# EAGLE board PCB___PULSE-SIEM_V1 (EAGLE 9.5.1)
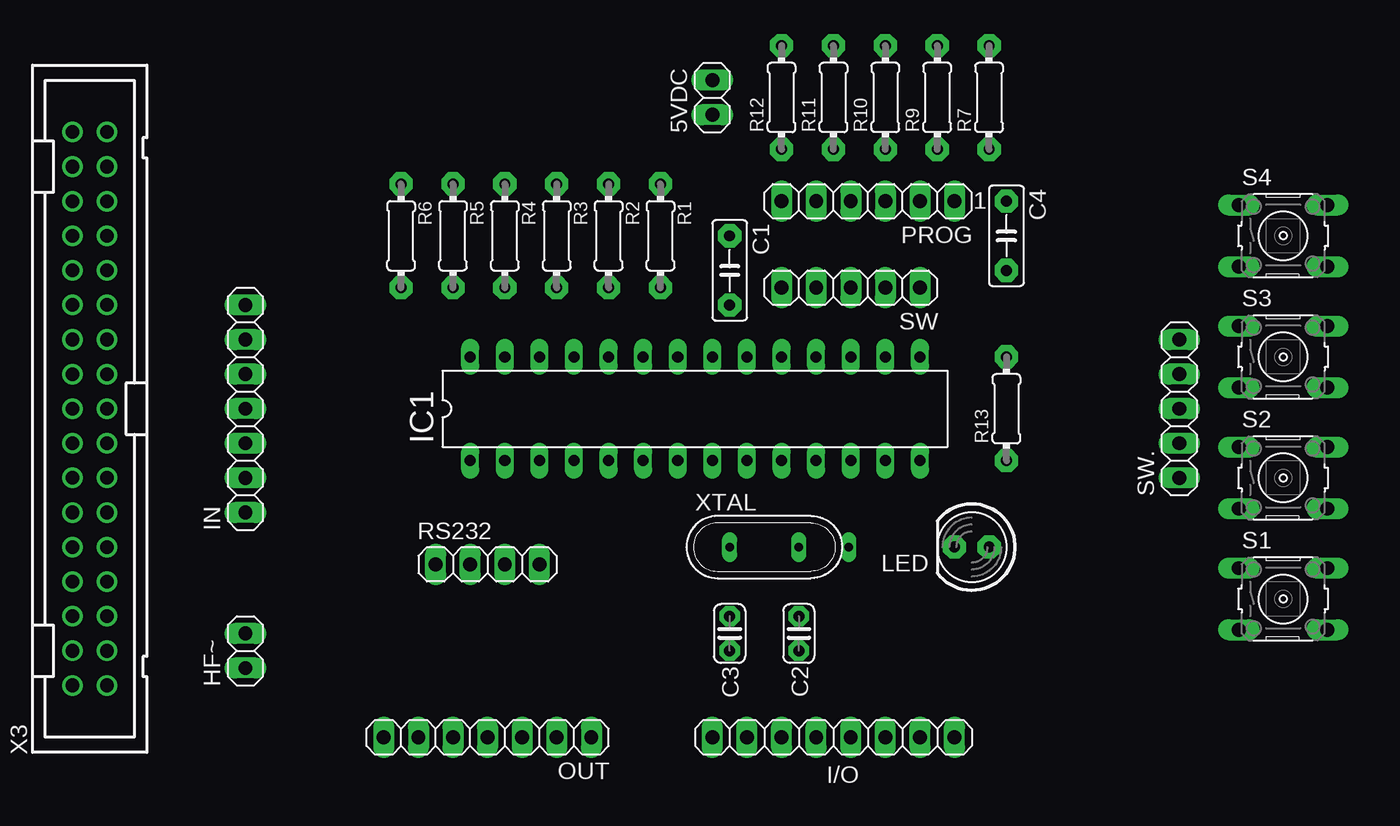
[diagram p0: board, top side]
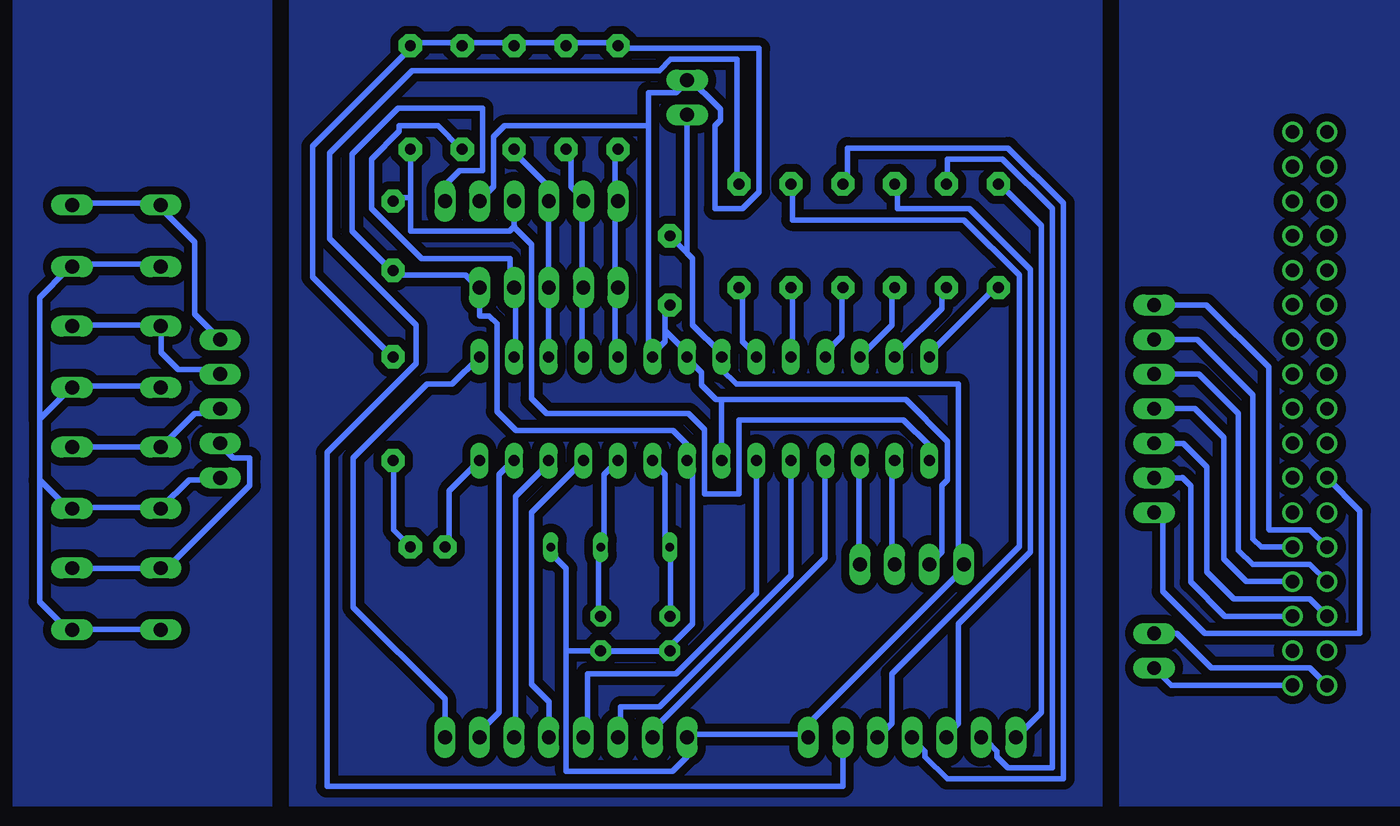
[diagram p1: board, bottom side, seen from below]

No outline drawn. Coordinates in mm, seen from the top.
Copper layers (1*16): Top 0.035mm / dielectric 1.5mm / Bottom 0.035mm
Design rules "default *": minimum track width 16mil, minimum drill 0.35mm, track to track 16mil, track to pad 16mil, pad to pad 16mil, via to via 16mil, smd to smd 16mil, copper to edge 40mil, drill to drill 16mil, minimum pad ring 10mil, minimum via ring 8mil, stop-mask expansion 4mil, vias tented up to drill 0mil, thermal gap 16mil

## Footprints (pad centres in the part's own frame; a part is rotated, then mirrored left to right if it is on the bottom)
1X02 = drill 1.016 long: 1 -1.27,0; 2 1.27,0
C050-025X075 = drill 0.8 pad 1.7 octagon: 1 -2.54,0; 2 2.54,0
C25-024X044 = drill 0.813 pad 1.5 octagon: 1 -1.27,0; 2 1.27,0
1X08 = drill 1.016 long: 1 -8.89,0; 2 -6.35,0; 3 -3.81,0; 4 -1.27,0; 5 1.27,0; 6 3.81,0; 7 6.35,0; 8 8.89,0
DIL28-3 = drill 0.813 long: 1 -16.51,-3.81; 2 -13.97,-3.81; 3 -11.43,-3.81; 4 -8.89,-3.81; 5 -6.35,-3.81; 6 -3.81,-3.81; 7 -1.27,-3.81; 8 1.27,-3.81; 9 3.81,-3.81; 10 6.35,-3.81; 11 8.89,-3.81; 12 11.43,-3.81; 13 13.97,-3.81; 14 16.51,-3.81; 15 16.51,3.81; 16 13.97,3.81; 17 11.43,3.81; 18 8.89,3.81; 19 6.35,3.81; 20 3.81,3.81; 21 1.27,3.81; 22 -1.27,3.81; 23 -3.81,3.81; 24 -6.35,3.81; 25 -8.89,3.81; 26 -11.43,3.81; 27 -13.97,3.81; 28 -16.51,3.81
1X07 = drill 1.016 long: 1 -7.62,0; 2 -5.08,0; 3 -2.54,0; 4 0,0; 5 2.54,0; 6 5.08,0; 7 7.62,0
LED_5MM = drill 0.8 pad 1.7 octagon: A -1.27,0; K 1.27,0
ICSP-AVR-6-PIN = drill 1.016 long: 1 -6.35,0; 2 -3.81,0; 3 -1.27,0; 4 1.27,0; 5 3.81,0; 6 6.35,0
RESISTOR_1/4_7.5 = drill 0.8 pad 1.7 octagon: 1 -3.81,0; 2 3.81,0
1X04 = drill 1.016 long: 1 -3.81,0; 2 -1.27,0; 3 1.27,0; 4 3.81,0
B3F-10XX = drill 1.016 long: 1 -3.251,2.261; 2 3.251,2.261; 3 -3.251,-2.261; 4 3.251,-2.261
1X05 = drill 1.016 long: 1 -5.08,0; 2 -2.54,0; 3 0,0; 4 2.54,0; 5 5.08,0
PAK100/2500-34 = drill 1 pad 1.422: 1 -20.32,-1.27; 2 -20.32,1.27; 3 -17.78,-1.27; 4 -17.78,1.27; 5 -15.24,-1.27; 6 -15.24,1.27; 7 -12.7,-1.27; 8 -12.7,1.27; 9 -10.16,-1.27; 10 -10.16,1.27; 11 -7.62,-1.27; 12 -7.62,1.27; 13 -5.08,-1.27; 14 -5.08,1.27; 15 -2.54,-1.27; 16 -2.54,1.27; 17 0,-1.27; 18 0,1.27; 19 2.54,-1.27; 20 2.54,1.27; 21 5.08,-1.27; 22 5.08,1.27; 23 7.62,-1.27; 24 7.62,1.27; 25 10.16,-1.27; 26 10.16,1.27; 27 12.7,-1.27; 28 12.7,1.27; 29 15.24,-1.27; 30 15.24,1.27; 31 17.78,-1.27; 32 17.78,1.27; 33 20.32,-1.27; 34 20.32,1.27
QS = drill 0.61 long: 1 -2.54,0; 2 2.54,0; GND 6.2,0

## Placement (x,y rotation side)
5VDC  [1X02]  30.48,52.07 90 top
C1  100nf  [C050-025X075]  31.75,39.37 270 top
C2  22pf  [C25-024X044]  36.83,12.7 90 top
C3  22pf  [C25-024X044]  31.75,12.7 90 top
C4  10nf  [C050-025X075]  52.07,41.91 270 top
HF~  [1X02]  -3.81,11.43 90 top
I/O  [1X08]  39.37,5.08 0 top
IC1  ATMEGA328P  [DIL28-3]  29.21,29.21 0 top
IN  [1X07]  -3.81,29.21 90 top
LED  [LED_5MM]  49.53,19.05 180 top
OUT  [1X07]  13.97,5.08 180 top
PROG  [ICSP-AVR-6-PIN]  41.91,44.45 180 top
R1  220R  [RESISTOR_1/4_7.5]  26.67,41.91 270 top
R2  220R  [RESISTOR_1/4_7.5]  22.86,41.91 270 top
R3  220R  [RESISTOR_1/4_7.5]  19.05,41.91 270 top
R4  220R  [RESISTOR_1/4_7.5]  15.24,41.91 270 top
R5  220R  [RESISTOR_1/4_7.5]  11.43,41.91 270 top
R6  220R  [RESISTOR_1/4_7.5]  7.62,41.91 270 top
R7  10K  [RESISTOR_1/4_7.5]  50.8,52.07 90 top
R9  10K  [RESISTOR_1/4_7.5]  46.99,52.07 90 top
R10  10K  [RESISTOR_1/4_7.5]  43.18,52.07 90 top
R11  10K  [RESISTOR_1/4_7.5]  39.37,52.07 90 top
R12  10K  [RESISTOR_1/4_7.5]  35.56,52.07 90 top
R13  1K  [RESISTOR_1/4_7.5]  52.07,29.21 90 top
RS232  [1X04]  13.97,17.78 0 top
S1  [B3F-10XX]  72.39,15.24 0 top
S2  [B3F-10XX]  72.39,24.13 0 top
S3  [B3F-10XX]  72.39,33.02 0 top
S4  [B3F-10XX]  72.39,41.91 0 top
SW  [1X05]  40.64,38.1 180 top
SW.  [1X05]  64.77,29.21 90 top
X3  [PAK100/2500-34]  -15.24,29.21 90 top
XTAL  20MHZ  [QS]  34.29,19.05 0 top

## Library data of the parts
5VDC HF~ I/O IN OUT RS232 SW SW. = pinhead
C1-C4 LED PROG R1-R7 R9-R13 XTAL = 00-tecnicosotv
IC1 = atmega8
S1-S4 = switch-omron; MPN: B3F-1000; OC_FARNELL: 176432; OC_NEWARK: 36M3542
X3 = con-3m; OC_FARNELL: unknown; OC_NEWARK: unknown

## Nets
1L1+: OUT.2 R1.1
1L1-: OUT.3 R2.1
1L2+: OUT.4 R3.1
1L2-: OUT.5 R4.1
1L3+: OUT.6 R5.1
1L3-: OUT.7 R6.1
+5V: 5VDC.2 C1.2 IC1.7 IC1.20 IC1.21 PROG.2 R7.2 R9.2 R10.2 R11.2 R12.2 R13.2 RS232.2
GND: 5VDC.1 C1.1 C2.1 C3.1 C4.2 I/O.1 IC1.8 IC1.22 OUT.1 PROG.1 RS232.1 SW.1
N$1: I/O.2 IC1.4
N$2: I/O.3 IC1.5
N$3: I/O.4 IC1.6
N$4: I/O.5 IC1.11
N$5: I/O.6 IC1.12
N$6: I/O.7 IC1.13
N$7: HF~.1 X3.1
N$8: IN.2 X3.5
N$9: C2.2 IC1.10 XTAL.2
N$10: C4.1 IC1.1 PROG.3 R7.1
N$11: S1.1 S1.2 SW..2
N$12: C3.2 IC1.9 XTAL.1
N$13: HF~.2 X3.2
N$14: S2.1 S2.2 SW..3
N$15: S3.1 S3.2 SW..4
N$16: S4.1 S4.2 SW..5
N$17: IC1.23 R1.2
N$18: IC1.24 R2.2
N$19: IC1.25 R3.2
N$20: IC1.26 R4.2
N$21: IC1.27 R5.2
N$22: IC1.28 R6.2
N$23: IN.3 X3.6
N$24: IN.4 X3.7
N$25: IN.5 X3.8
N$26: IC1.14 LED.K
N$27: LED.A R13.1
N$28: S1.3 S1.4 S2.3 S2.4 S3.3 S3.4 S4.3 S4.4 SW..1
N$29: IN.6 X3.9
N$30: IN.7 X3.10
N$31: IN.1 X3.14
N$32: I/O.8 IC1.15
RX: IC1.2 RS232.3
S1: IC1.16 R9.1 SW.2
S2: IC1.17 PROG.4 R10.1 SW.3
S3: IC1.18 PROG.5 R11.1 SW.4
S4: IC1.19 PROG.6 R12.1 SW.5
TX: IC1.3 RS232.4

## Tracks (layer width: path | path; a pad name or v marks a point on that pad's centre or on a via)
1L1+
  Bottom 0.406: R1.1 26.82,45.92 26.82,54.86 31.7,54.86 32.51,54.05 50.67,54.05 56.74,47.98 56.74,41.71 50.39,35.36 50.39,32.51 56.92,25.98 56.92,1.47 19.05,1.47 OUT.2
1L1-
  Bottom 0.406: OUT.3 16.26,5.28 15.44,6.1 15.44,9.75 6.1,19.1 6.1,39.01 10.16,43.08 22.76,43.08 22.76,45.52 R2.1
1L2+
  Bottom 0.406: OUT.4 13.82,4.88 13.01,4.06 13.01,3.66 11.38,2.03 2.85,2.03 2.85,44.3 6.91,48.36 18.69,48.36 18.69,45.92 R3.1
1L2-
  Bottom 0.406: OUT.5 11.38,5.28 10.57,6.1 10.57,13.41 5.28,18.69 5.28,39.42 9.75,43.89 15.04,43.89 15.04,45.52 R4.1
1L3+
  Bottom 0.406: OUT.6 8.53,4.88 7.72,4.06 7.72,3.66 6.91,2.85 3.66,2.85 3.66,43.89 7.32,47.55 11.38,47.55 11.38,45.92 R5.1
1L3-
  Bottom 0.406: OUT.7 6.1,5.28 4.47,6.91 4.47,42.67 7.32,45.52 R6.1
+5V
  Bottom 0.406: R13.2 52.43,33.33 57.99,38.89 57.99,48.49 50.8,55.68 R7.2 50.8,56.08 47.14,56.08 R9.2 46.74,56.08 43.48,56.08 R10.2 43.08,56.08 39.42,56.08 R11.2 39.01,56.08 35.76,56.08 R12.2 35.36,55.68 25.2,55.68 25.2,45.11 26.42,43.89 28.45,43.89 28.45,49.99 28.04,50.39 28.04,51.21 30.48,53.65 5VDC.2 30.48,53.24 31.29,52.43 33.33,52.43 33.33,49.99 | RS232.2 11.79,18.69 11.79,23.57 11.38,23.98 11.38,26.82 14.43,29.87 27.94,29.87 | 32.11,34.95 32.11,36.58 C1.2 | 32.11,34.95 32.11,34.14 32.92,33.33 IC1.20 33.33,33.33 33.33,49.99 | 33.33,49.99 43.89,49.99 44.7,49.17 44.7,45.52 45.52,44.7 PROG.2 | 32.11,34.95 30.48,33.33 IC1.21 30.48,32.92 29.44,31.88 29.44,30.94 28.37,29.87 27.94,29.87 | IC1.7 27.94,29.87
ABB
  pour Bottom (isolate 0.61): -22.86,0 -1.27,0 -1.27,59.69 -22.86,59.69
ABC
  pour Bottom (isolate 0.61): 0,0 59.69,0 59.69,59.69 0,59.69
ABF
  pour Bottom (isolate 0.61): 60.96,0 80.01,0 80.01,59.69 60.96,59.69
GND
  Bottom 0.406: 52.05,39.21 52.02,39.01 46.74,39.01 45.92,38.2 SW.1 45.72,36.04 45.7,36.02 45.01,36.02 44.45,35.46 44.45,29.01 43.05,27.61 31.52,27.61 30.48,26.57 IC1.8 30.48,25.2 30.07,24.79 30.07,13.41 31.7,11.79 C3.1 | 52.05,39.21 C4.2 | C2.1 36.58,11.38 32.11,11.38 C3.1 | C1.1 30.48,40.64 | 30.48,40.64 30.07,40.23 30.07,35.36 28.04,33.33 IC1.22 | 30.48,40.64 5VDC.1 | 10.57,17.07 21.54,6.1 21.54,5.28 OUT.1 21.95,5.28 30.48,5.28 I/O.1 30.48,3.66 31.55,2.59 39.37,2.59 39.37,11.43 | 10.57,17.07 10.16,17.48 RS232.1 10.57,17.07 | 27.64,32.92 IC1.22 | 40.54,19.13 40.54,18.64 39.37,17.48 39.37,11.43 | C3.1 39.37,11.43 | PROG.1 48.26,45.62 47.19,46.69 45.52,46.69 45.52,51.28 51.71,51.28 55.09,47.9 55.09,42.26 52.05,39.21 | IC1.22 27.94,32.08 26.87,31.01 10.57,31.01 10.57,17.07
N$1
  Bottom 0.406: I/O.2 32.92,5.28 32.92,5.69 20.34,18.26 20.34,25.38 IC1.4
N$2
  Bottom 0.406: I/O.3 35.36,5.28 35.36,7.32 32.51,7.32 22.86,16.97 IC1.5
N$3
  Bottom 0.406: I/O.4 37.8,5.28 37.8,9.75 31.29,9.75 25.4,15.65 IC1.6
N$4
  Bottom 0.406: IC1.11 41.91,21.59 41.91,8.97 40.62,7.67 40.62,5.11 I/O.5
N$5
  Bottom 0.406: IC1.12 40.64,25.2 43.08,22.76 43.08,5.28 I/O.6
N$6
  Bottom 0.406: IC1.13 43.48,25.2 44.3,24.38 44.3,6.91 45.52,5.69 45.52,5.28 I/O.7
N$7
  Bottom 0.406: X3.1 -5.08,8.89 HF~.1
N$8
  Bottom 0.406: IN.2 -5.87,24.13 -5.89,24.16 -6.5,23.55 -6.5,16.48 -9.02,13.97 X3.5
N$9
  Bottom 0.406: C2.2 36.98,14.22 36.98,18.69 XTAL.2 36.58,19.1 36.58,24.38 IC1.10
N$10
  Bottom 0.406: R7.1 50.8,44.7 | 50.8,44.7 50.8,42.27 43.51,42.27 43.16,42.62 43.18,42.65 PROG.3 43.18,42.55 41.91,41.27 41.91,29.95 40.82,28.85 30.38,28.85 29.21,27.69 29.21,22.94 26.67,22.94 26.67,28.4 14.61,28.4 12.7,26.49 IC1.1 | 50.8,44.7 52.02,44.7 C4.1
N$11
  Bottom 0.406: SW..2 64.62,26.42 63.8,25.6 62.59,25.6 62.59,23.57 68.28,17.88 69.09,17.88 S1.1 69.49,17.48 75.59,17.48 S1.2
N$12
  Bottom 0.406: C3.2 31.7,14.22 31.7,18.69 XTAL.1 32.11,19.1 32.11,24.38 32.92,25.2 IC1.9
N$13
  Bottom 0.406: X3.2 -15.24,10.16 -8,10.16 -5.46,12.7 HF~.2
N$14
  Bottom 0.406: SW..3 65.02,28.85 66.65,28.85 69.09,26.42 S2.1 69.49,26.42 75.59,26.42 S2.2
N$15
  Bottom 0.406: SW..4 65.02,32.11 67.87,32.11 69.09,33.33 69.09,34.95 S3.1 69.49,35.36 75.59,35.36 S3.2
N$16
  Bottom 0.406: SW..5 66.65,36.17 66.65,41.45 69.09,43.89 S4.1 69.49,44.3 75.59,44.3 S4.2
N$17
  Bottom 0.406: IC1.23 25.6,33.33 26.42,34.14 26.42,37.8 R1.2
N$18
  Bottom 0.406: IC1.24 22.76,33.33 22.76,37.8 R2.2
N$19
  Bottom 0.406: IC1.25 20.32,33.33 19.1,34.54 19.1,37.8 R3.2
N$20
  Bottom 0.406: IC1.26 15.44,35.36 15.44,37.8 R4.2
N$21
  Bottom 0.406: IC1.27 15.04,33.33 11.79,36.58 11.79,37.8 R5.2
N$22
  Bottom 0.406: IC1.28 12.6,33.33 7.72,38.2 R6.2
N$23
  Bottom 0.406: X3.6 -15.24,15.24 -9.65,15.24 -7.67,17.22 -7.67,24.94 -5.94,26.67 IN.3
N$24
  Bottom 0.406: X3.7 -10.57,16.51 -8.91,18.16 -8.91,27.1 -6.81,29.21 IN.4
N$25
  Bottom 0.406: X3.8 -15.24,17.78 -11.05,17.78 -10.01,18.82 -10.01,28.85 -7.11,31.75 IN.5
N$26
  Bottom 0.406: IC1.14 47.95,23.16 47.95,19.1 LED.K
N$27
  Bottom 0.406: LED.A 50.8,19.1 52.02,20.32 52.02,25.2 R13.1
N$28
  Bottom 0.406: SW..1 65.02,23.98 67.06,23.98 69.09,21.95 S2.3 69.49,21.95 75.59,21.95 S2.4 76,21.95 78.03,23.98 | S4.3 69.49,39.83 75.59,39.83 S4.4 76,39.42 78.03,37.39 78.03,28.45 | S1.3 69.49,13.01 75.59,13.01 S1.4 76,13.01 78.03,15.04 78.03,23.98 | 78.03,28.45 78.03,23.98 | 78.03,28.45 76,30.48 S3.4 75.59,30.89 69.49,30.89 S3.3
N$29
  Bottom 0.406: X3.9 -11.68,19.05 -11.07,19.66 -11.07,30.2 -6.99,34.29 IN.6
N$30
  Bottom 0.406: X3.10 -15.24,20.32 -12.27,20.32 -12.22,20.37 -12.22,32.26 -7.64,36.83 IN.7
N$31
  Bottom 0.406: IN.1 -4.45,20.95 -4.45,15.8 -7.54,12.7 -18.92,12.7 -18.92,21.72 X3.14
N$32
  Bottom 0.406: IC1.15 47.73,31.01 49.55,31.01 54.99,25.58 54.99,14.63 48.26,7.9 I/O.8
RX
  Bottom 0.406: IC1.2 15.44,25.2 15.44,17.88 RS232.3
S1
  Bottom 0.406: IC1.16 43.08,33.33 43.08,37.8 SW.2 43.48,38.2 43.48,40.23 45.64,40.23 | 45.64,40.23 49.99,40.23 53.65,43.89 53.65,47.55 51.61,49.58 51.61,49.99 48.77,49.99 47.14,48.36 R9.1 | 45.64,40.23
S2
  Bottom 0.406: IC1.17 SW.3 PROG.4 40.64,45.52 43.08,47.95 R10.1
S3
  Bottom 0.406: IC1.18 38.2,33.33 38.2,37.8 SW.4 38.2,38.2 38.2,44.3 PROG.5 38.2,44.7 39.01,45.52 39.01,47.95 R11.1
S4
  Bottom 0.406: R12.1 35.76,47.95 35.76,44.7 PROG.6 35.76,44.3 35.76,38.2 SW.5 35.76,37.8 35.76,33.33 IC1.19
TX
  Bottom 0.406: IC1.3 17.88,25.2 17.88,17.88 RS232.4

## Text on the board
tValues: 1 | 1 | 1 | 1 | 1 | 1 | 1 | 1 | 1